# Altium PCB PCB.PcbDoc
Units mm, origin at the board's own origin, x right, y up, seen from the top; angles counter-clockwise.
Board outline 70 x 70 mm, 4 copper layers (Top Layer, Internal Plane 1, Internal Plane 2, Bottom Layer), stack 0.462 mm thick; 54 components, 48 nets, 334 pads, 42 vias.
Unrouted connection lines stored in the file: 5.
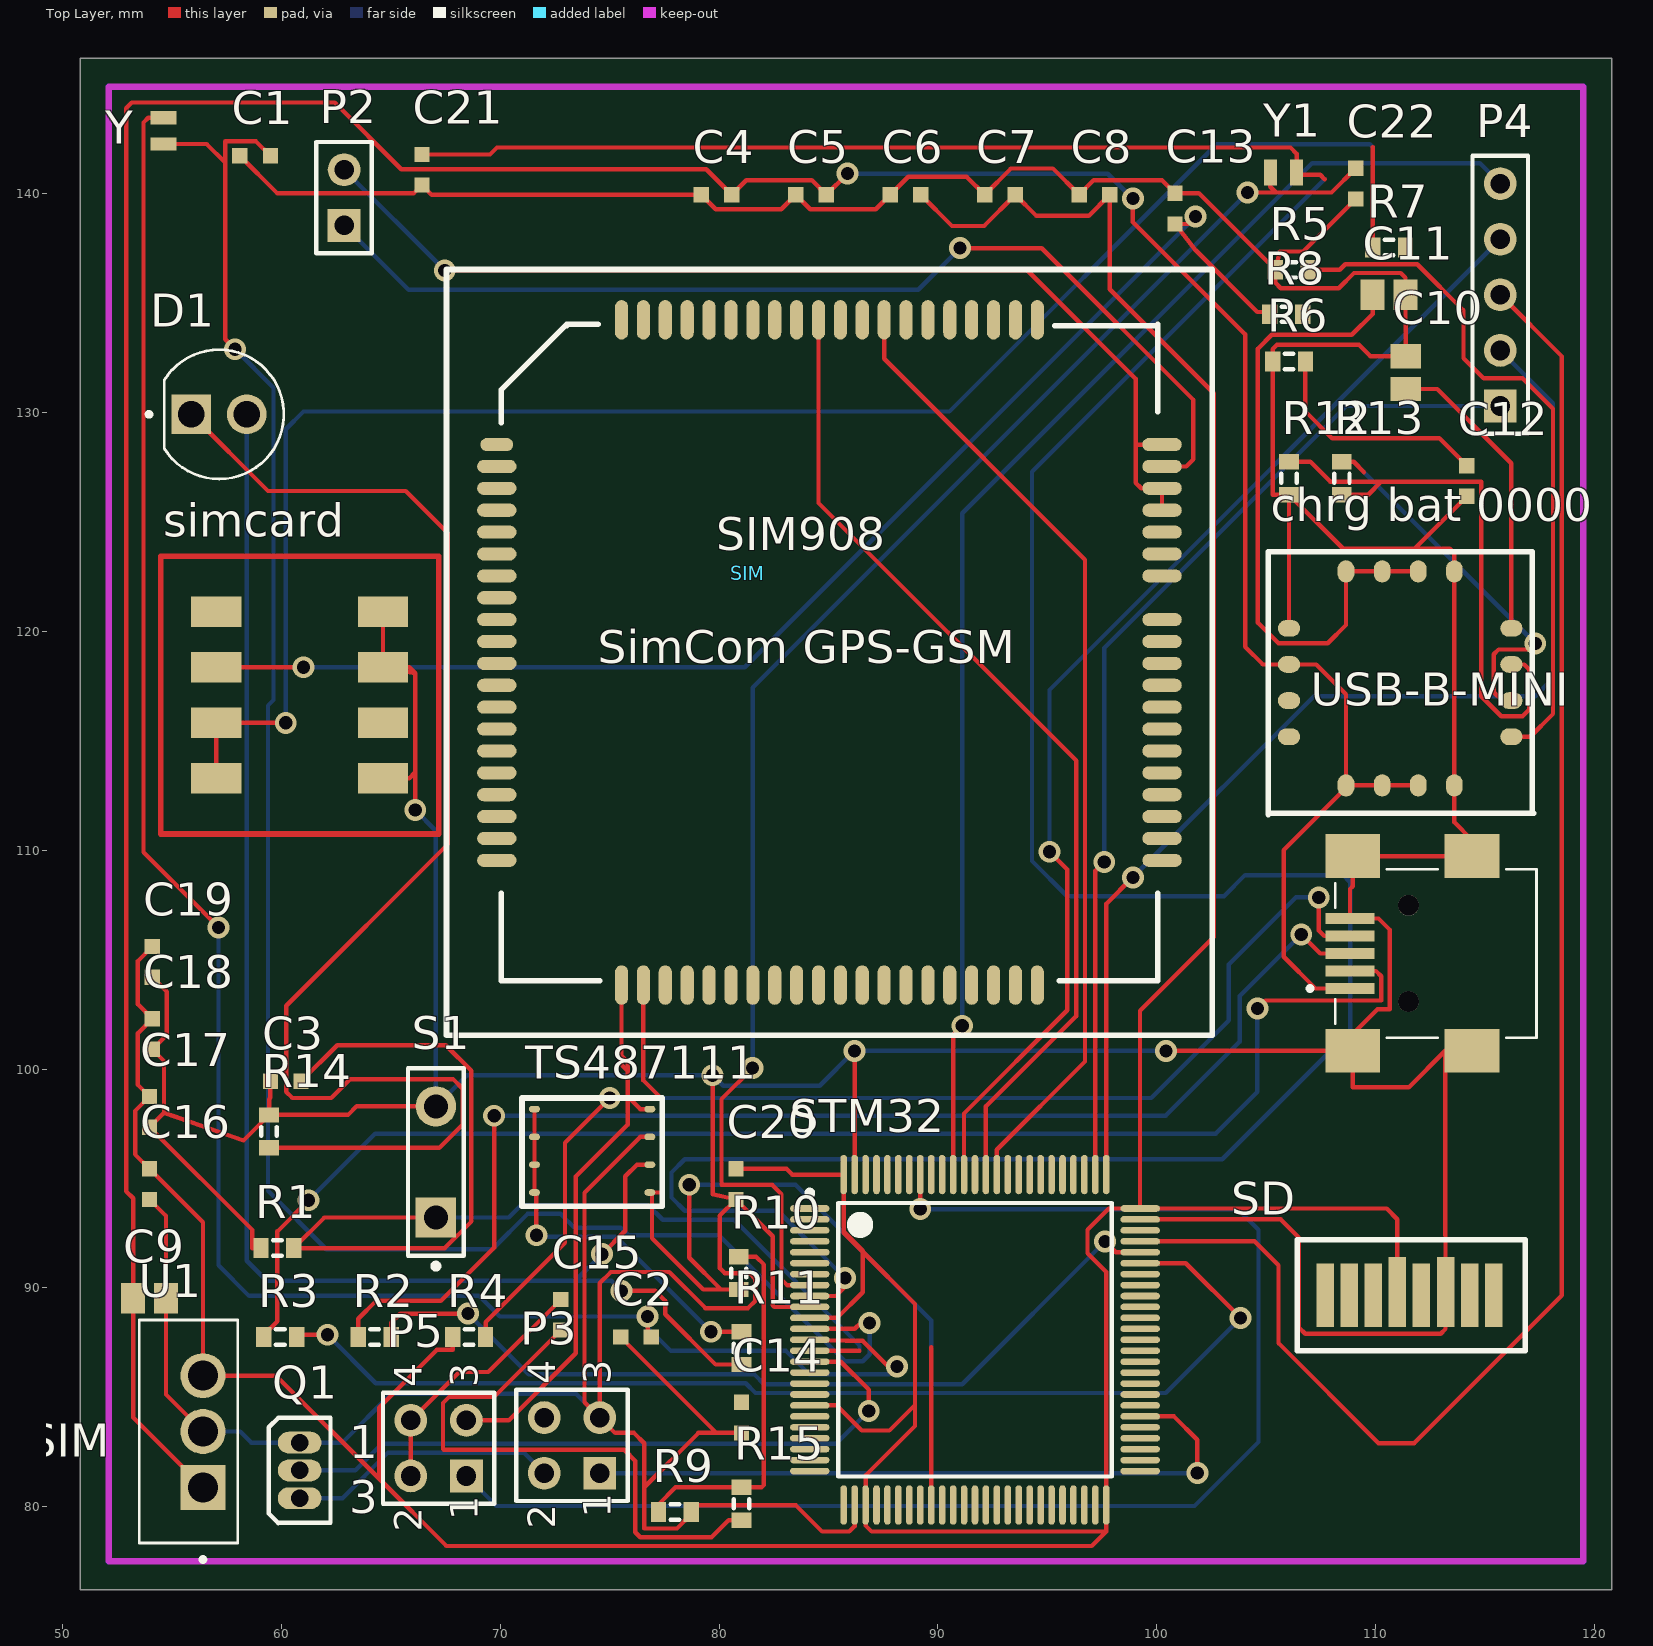
[diagram p0: Top Layer view]
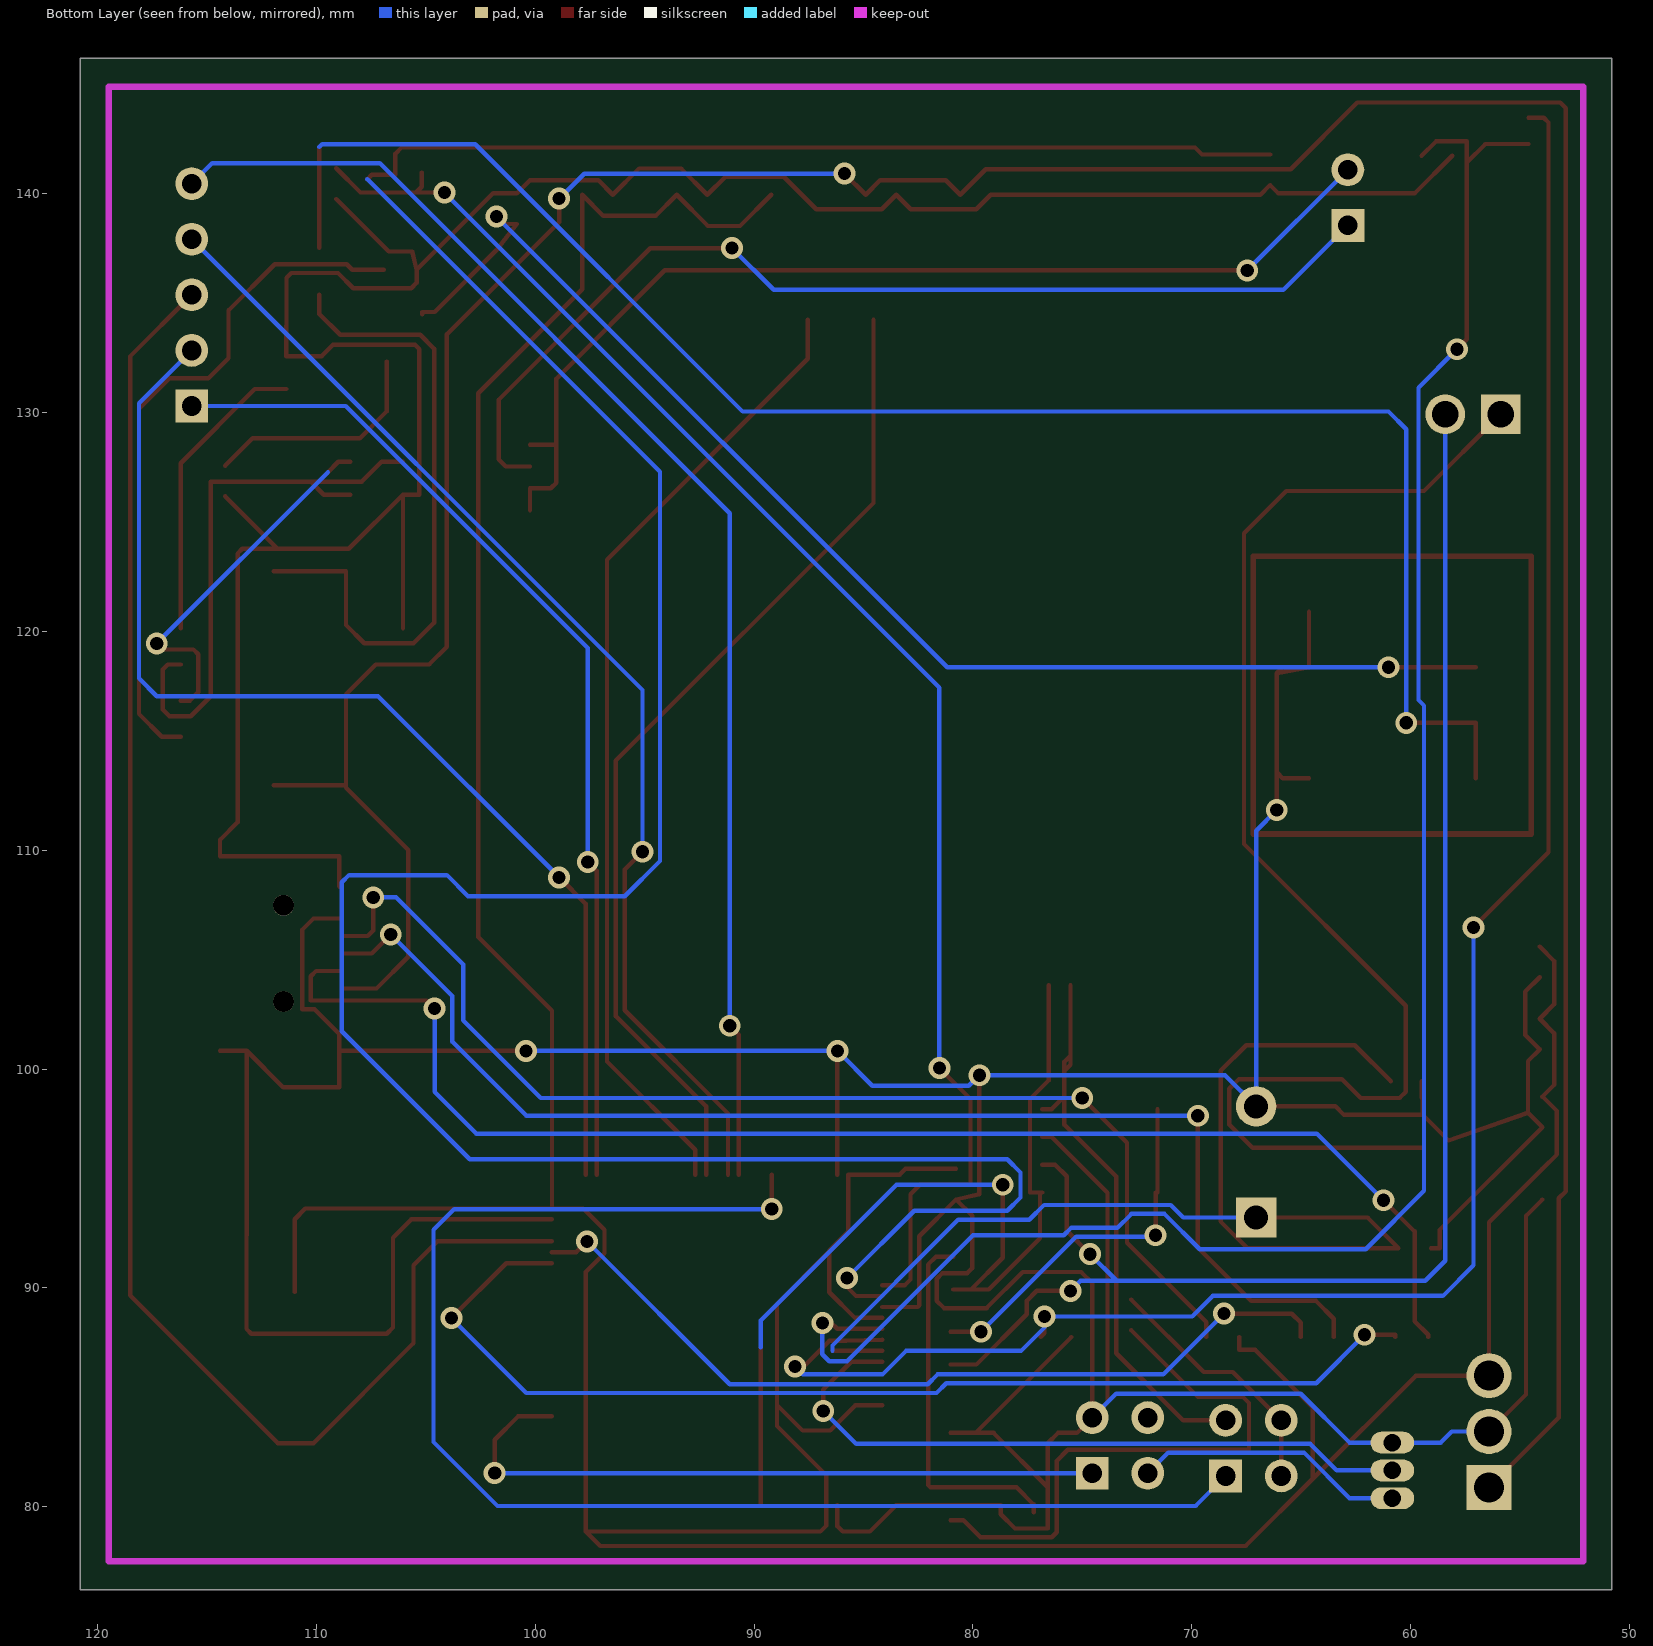
[diagram p1: Bottom Layer view, seen from below]
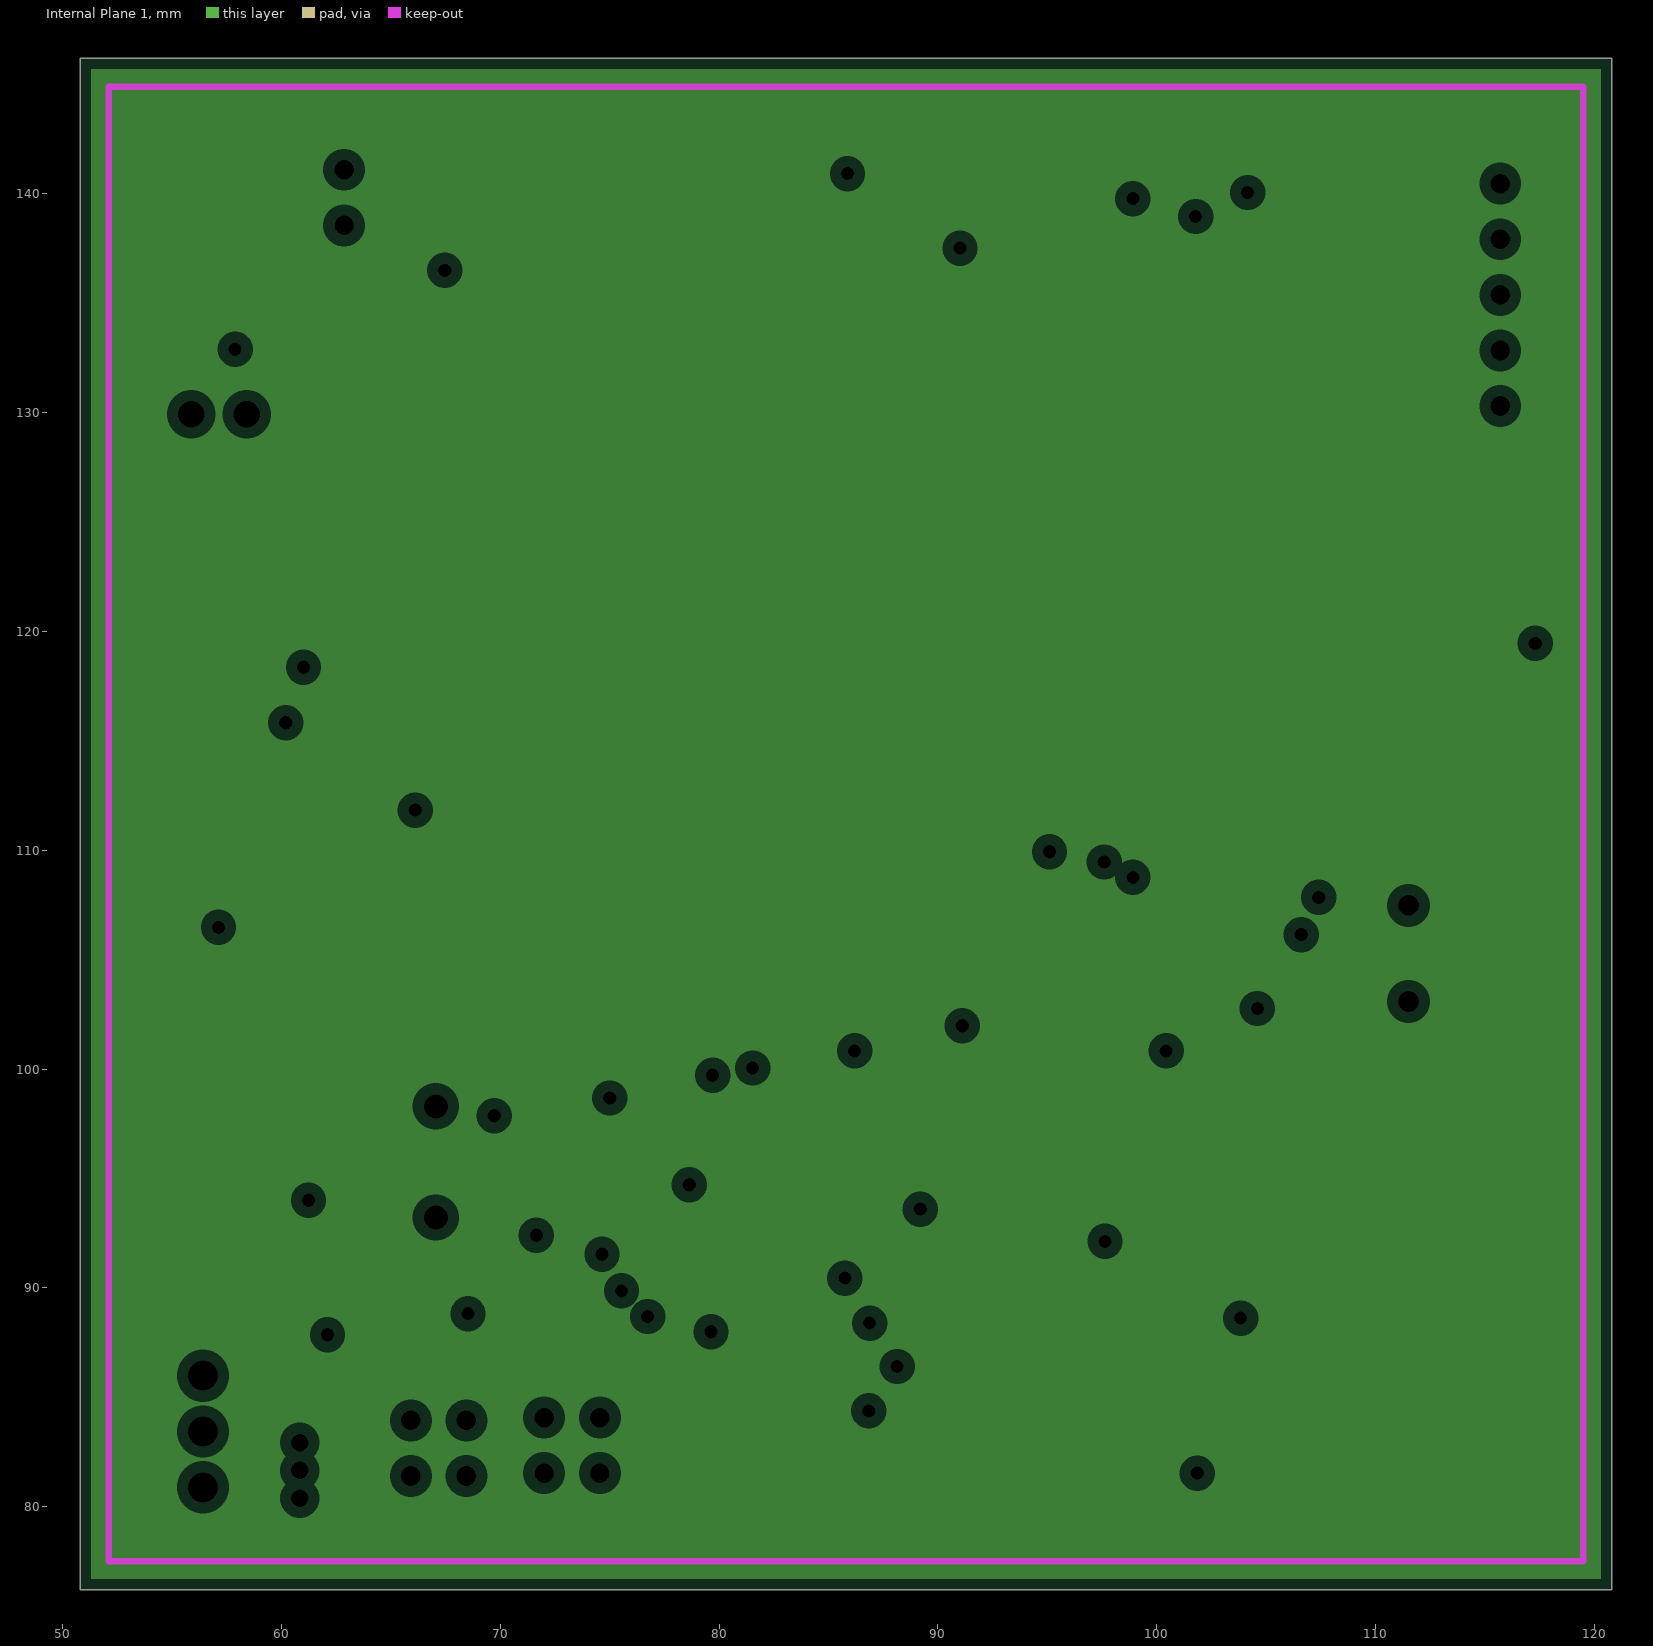
[diagram p2: Internal Plane 1, clearances drawn from the general rule]
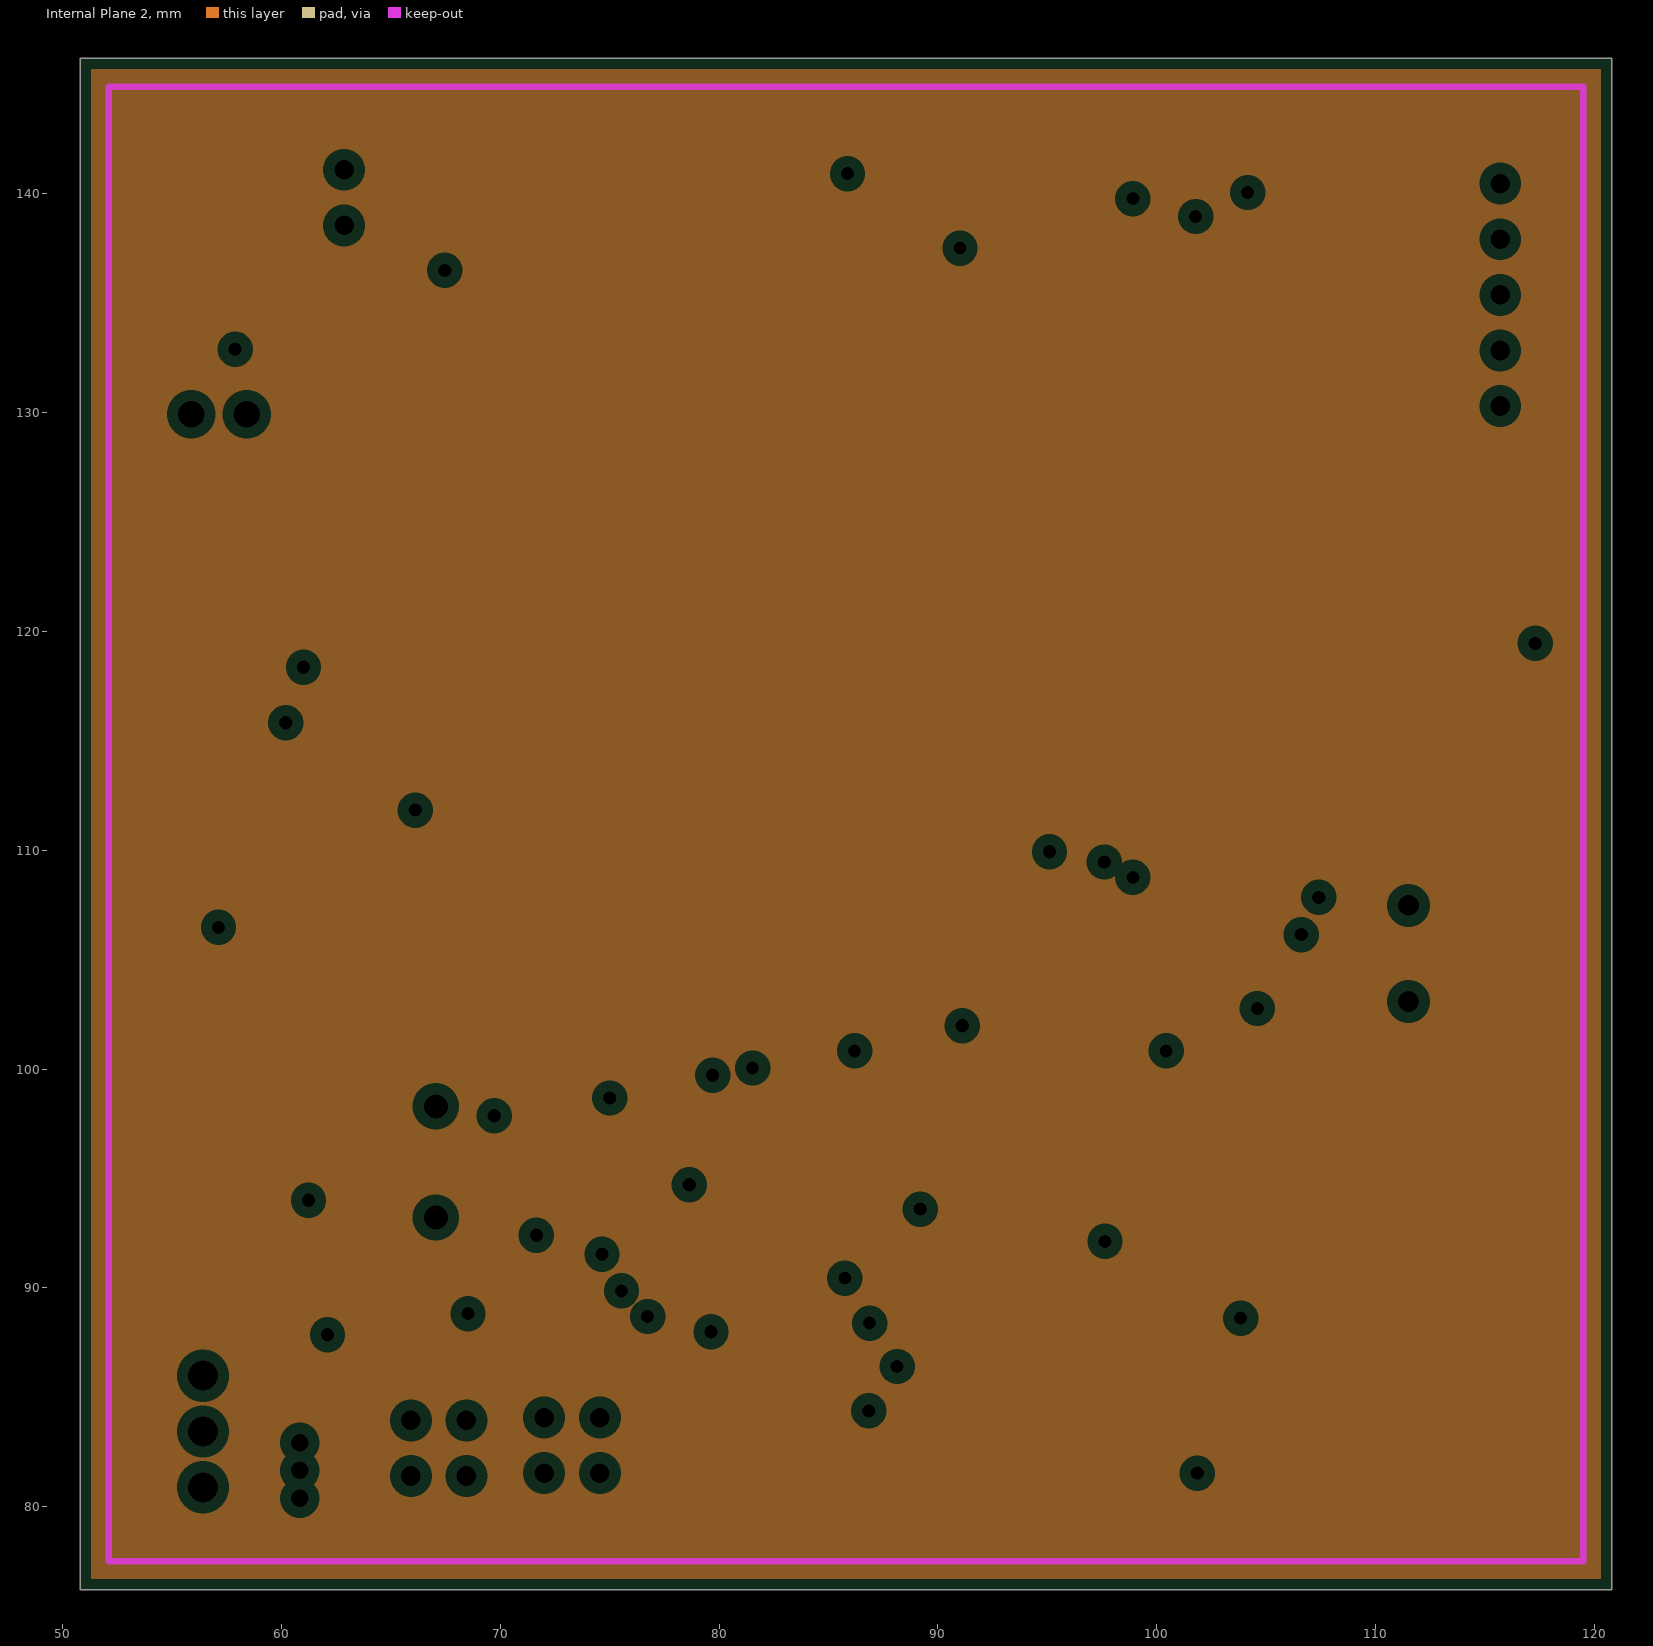
[diagram p3: Internal Plane 2, clearances drawn from the general rule]
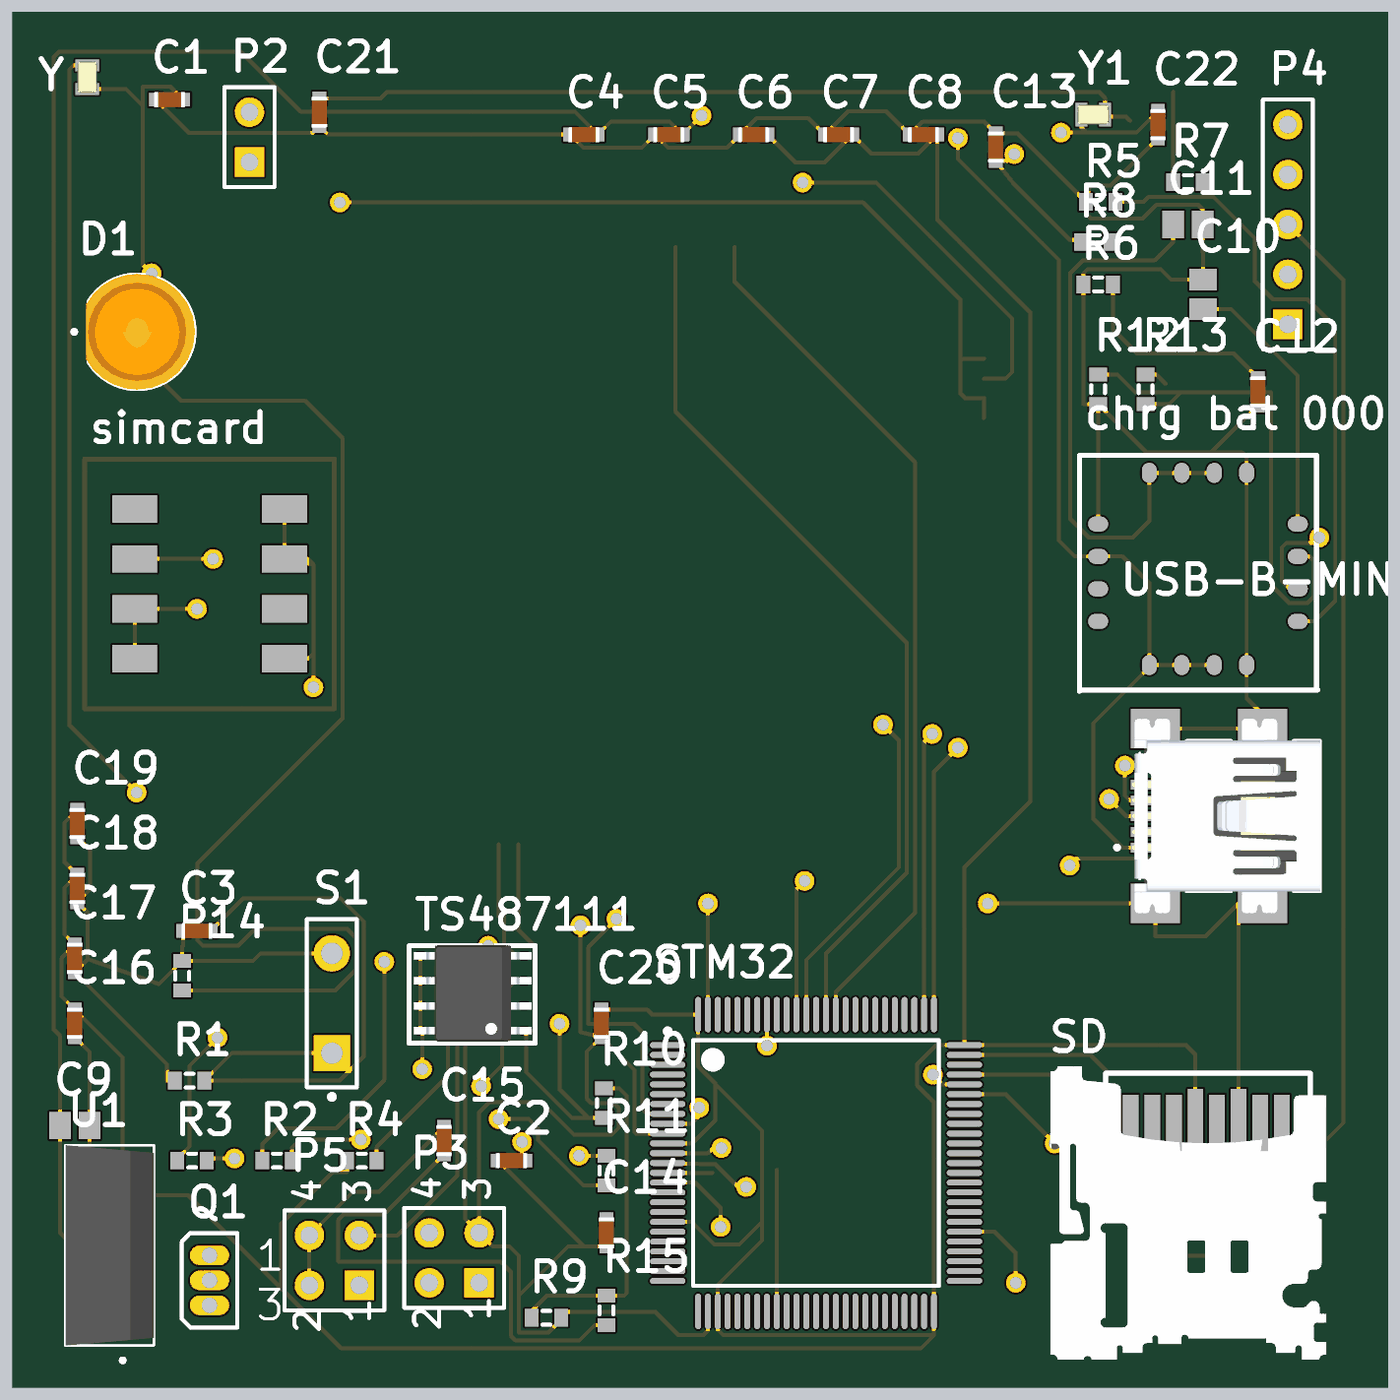
[diagram p4: 3D render of the assembled board from above, using the file's embedded part models]

## Layer stack, top to bottom
Top Solder: solder mask 0.0102, Solder Resist, Dk 3.5
Top Layer: signal copper 0.0356
Internal Plane 1: plane copper 0.0356
Internal Plane 2: plane copper 0.0356
Dielectric 1: dielectric 0.32, FR-4, Dk 4.8
Bottom Layer: signal copper 0.0356
Bottom Solder: solder mask 0.0102, Solder Resist, Dk 3.5

## Board outline
50.8,76.2 120.8,76.2 120.8,146.2 50.8,146.2

## Design rules (kind name [scope] priority, off if disabled: settings)
Clearance [All] p1: gap=0.2
PlaneClearance [All] p1: clearance=0.508
PlaneConnect [All] p1: planeconnectstyle=Relief reliefexpansion=0.508 reliefentries=4 reliefconductorwidth=0.254 reliefairgap=0.254
PolygonConnect [All] p1: connectstyle=Relief reliefconductorwidth=0.254 reliefentries=4 polygonreliefangle="90 Angle" airgapwidth=0.254
RoutingVias [All] p1: holewidth=0.6 width=1 viastyle="Through Hole" minholewidth=0.711 minwidth=1.27 maxholewidth=0.711 maxwidth=1.27
SolderMaskExpansion [All] p1: expansion=0.102
Width [All] p1: maxlimit=0.2 minlimit=0.2 preferedwidth=0.2
28 further rules are at their usual default settings.

## Components (designator, comment, footprint, x,y, rotation, side; value= is the part's Value field where it differs from the comment)
C1 "CGJ3E3C0G2D101J080AA" CAP_CGJ3E3C0G2D101J080AA 58.801,141.732 r0 top
C2 "CGJ3E3C0G2D101J080AA" CAP_CGJ3E3C0G2D101J080AA 76.2,87.757 r0 top
C3 "CGJ3E3C0G2D101J080AA" CAP_CGJ3E3C0G2D101J080AA 60.198,99.441 r0 top
C4 "CGJ3E3C0G2D101J080AA" CAP_CGJ3E3C0G2D101J080AA 79.883,139.954 r0 top
C5 "CGJ3E3C0G2D101J080AA" CAP_CGJ3E3C0G2D101J080AA 84.201,139.954 r0 top
C6 "CGJ3E3C0G2D101J080AA" CAP_CGJ3E3C0G2D101J080AA 88.519,139.954 r0 top
C7 "CGJ3E3C0G2D101J080AA" CAP_CGJ3E3C0G2D101J080AA 92.837,139.954 r0 top
C8 "CGJ3E3C0G2D101J080AA" CAP_CGJ3E3C0G2D101J080AA 97.155,139.954 r0 top
C9 "Cap Pol3" C0805 53.975,89.535 r0 top
C10 "Cap Pol3" C0805 111.379,131.826 r90 top
C11 "Cap Pol3" C0805 110.617,135.382 r0 top
C12 "CGJ3E3C0G2D101J080AA" CAP_CGJ3E3C0G2D101J080AA 114.173,126.873 r90 top
C13 "CGJ3E3C0G2D101J080AA" CAP_CGJ3E3C0G2D101J080AA 100.838,139.319 r90 top
C14 "CGJ3E3C0G2D101J080AA" CAP_CGJ3E3C0G2D101J080AA 81.026,84.074 r90 top
C15 "CGJ3E3C0G2D101J080AA" CAP_CGJ3E3C0G2D101J080AA 72.771,88.773 r90 top
C16 "CGJ3E3C0G2D101J080AA" CAP_CGJ3E3C0G2D101J080AA 53.975,94.742 r90 top
C17 "CGJ3E3C0G2D101J080AA" CAP_CGJ3E3C0G2D101J080AA 53.975,98.044 r90 top
C18 "CGJ3E3C0G2D101J080AA" CAP_CGJ3E3C0G2D101J080AA 54.102,101.6 r90 top
C19 "CGJ3E3C0G2D101J080AA" CAP_CGJ3E3C0G2D101J080AA 54.102,104.902 r90 top
C20 "CGJ3E3C0G2D101J080AA" CAP_CGJ3E3C0G2D101J080AA 80.772,94.742 r90 top
C21 "CGJ3E3C0G2D101J080AA" CAP_CGJ3E3C0G2D101J080AA 66.421,141.097 r90 top
C22 "CGJ3E3C0G2D101J080AA" CAP_CGJ3E3C0G2D101J080AA 109.093,140.462 r90 top
"chrg bat 0000" "chrg bat 0000" "chrg bat 0000" 106.045,115.189 r90 top
D1 "L08R5000Q1" LEDRD254W57D500H1070 57.15,129.921 r0 top
P2 "Header 2" HDR1X2 62.865,138.557 r90 top
P3 "Header 2X2" HDR2X2 74.549,81.534 r90 top
P4 "Header 5" HDR1X5 115.697,130.302 r90 top
P5 "Header 2X2" HDR2X2 68.453,81.407 r90 top
Q1 "MOSFET-P" E3 60.833,81.661 r0 top
R1 "Res3" J1-0603 59.817,91.821 r0 top
R2 "Res3" J1-0603 64.262,87.757 r0 top
R3 "Res3" J1-0603 59.944,87.757 r0 top
R4 "Res3" J1-0603 68.58,87.757 r0 top
R5 "Res3" J1-0603 106.172,136.525 r0 top
R6 "Res3" J1-0603 106.045,132.334 r0 top
R7 "Res3" J1-0603 110.617,137.541 r0 top
R8 "Res3" J1-0603 105.918,134.493 r0 top
R9 "Res3" J1-0603 77.978,79.756 r0 top
R10 "Res3" J1-0603 80.899,90.678 r90 top
R11 "Res3" J1-0603 81.026,87.249 r90 top
R12 "Res3" J1-0603 106.045,127 r90 top
R13 "Res3" J1-0603 108.458,127 r90 top
R14 "Res3" J1-0603 59.436,97.155 r90 top
R15 "Res3" J1-0603 81.026,80.137 r90 top
S1 "SW-PB" SPST-2 67.056,95.758 r90 top
SD "SD" sd2 107.696,89.662 r0 top
SIM "SIM908" "Sim 908" 790.321,1066.927 r0 top
simcard "MOLEX91228A" PCBComponent_1 57.023,120.904 r0 top
STM32 "STM32F407VGT6" STM-LQFP100_N 91.694,87.63 r0 top
TS487111 "TS487111" TS4871B 71.628,95.377 r90 top
U1 "L7805" TO255P1020X450X2000-3 55.753,83.439 r90 top
USB-B-MINI "10033526-N3212LF" AMPHENOL_10033526-N3212LF 111.506,105.283 r90 top
Y "XTAL" XTAL_CM9V-T1A-32.768KHZ-7PF-20PPM-TA-QC 54.61,142.875 r90 top
Y1 "XTAL" XTAL_CM9V-T1A-32.768KHZ-7PF-20PPM-TA-QC 105.791,140.97 r0 top

## Footprints (in the part's own frame and the unit in brackets; to place one, negate y for a bottom-side part, rotate by r counter-clockwise, add the part's x,y. Pads: shape width x height; smd on the part's side, far side on the other; paste and mask are expansions set on the pad)
AMPHENOL_10033526-N3212LF [mm]
  rect 0.5x2.25 smd: 1(-1.6,2.675) 2(-0.8,2.675) 3(0,2.675) 4(0.8,2.675) 5(1.6,2.675)
  rect 2x2.5 smd: SH1(-4.45,2.55) SH2(4.45,2.55) SH3(-4.45,-2.9) SH4(4.45,-2.9)
  round 0.95 hole 0.95 unplated: ""(-2.2,0) ""(2.2,0)
  silkscreen extent -3.85,-5.85 3.85,4.6, body extent -4.95,-5.85 4.95,3.72, height 3.95
C0805 [mm] "Chip Capacitor, Body 2.0x1.3mm, IPC High Density"
  rect 1.1x1.4 smd: 1(-0.75,0) 2(0.75,0)
  body extent -1.1,-0.72 1.1,0.72, height 1.4
CAP_CGJ3E3C0G2D101J080AA [mm]
  rect 0.7x0.7 smd: 1(-0.7,0) 2(0.7,0)
  body extent -0.8,-0.4 0.8,0.4, height 0.9
"chrg bat 0000" [mil] "chrg bat 0000"
  oval 40x30 smd: 1(-87.5,-102.5) 2(-87.5,-167.5) 3(-87.5,-232.5) 4(-87.5,-297.5) 9(297.5,-297.5) 10(297.5,-232.5) 11(297.5,-167.5) 12(297.5,-102.5)
  oval 30x40 smd: 5(0,-400) 6(65,-400) 7(130,-400) 8(195,-400) 13(195,0) 14(130,0) 15(65,0) 16(0,0)
  silkscreen extent -140,-440 332,38
E3 [mm] "TO, Flat Index; 3 In-Line, Axial Leads; Body Dia. 4.6mm; Lead Dia. 0.5 mm (max)"
  oval 2x1 hole 0.8: 1(0,1.27) 2(0,0) 3(0,-1.27)
  silkscreen extent -1.41,-2.41 1.41,2.41
HDR1X2 [mm] "Connector; Header; 2 Position"
  rect 1.5x1.5 hole 0.9: 1(0,0)
  round 1.5 hole 0.9: 2(2.54,0)
  silkscreen extent -1.27,-1.27 3.81,1.27
HDR1X5 [mm] "Connector; Header; 5 Position"
  rect 1.5x1.5 hole 0.9: 1(0,0)
  round 1.5 hole 0.9: 2(2.54,0) 3(5.08,0) 4(7.62,0) 5(10.16,0)
  silkscreen extent -1.27,-1.27 11.43,1.27
HDR2X2 [mm] "Connector; Header; 2x2 Position"
  rect 1.5x1.5 hole 0.9: 1(0,0)
  round 1.5 hole 0.9: 2(0,2.54) 3(2.54,0) 4(2.54,2.54)
  silkscreen extent -1.27,-1.27 3.81,3.81
J1-0603 [mm] "Chip Resistor, Body 1.6x0.8mm, IPC High Density"
  rect 0.7x0.9 smd: 1(-0.75,0) 2(0.75,0)
  silkscreen extent -0.2,-0.35 0.2,0.35, body extent -0.85,-0.48 0.85,0.48, height 0.9
LEDRD254W57D500H1070 [mm]
  round 1.815 hole 1.21: A(1.27,0)
  rect 1.815x1.815 / inner round 1.815 / far side rect 1.815x1.815 hole 1.21: C(-1.27,0)
  silkscreen extent -3.3,-2.96 2.96,2.96, body extent -2.6,-2.95 2.95,2.95, height 9.1
PCBComponent_1 [mm]
  rect 2.3x1.4 smd: 1(0,0) 2(0,-2.54) 3(0,-5.08) 4(0,-7.62) 5(7.62,0) 6(7.62,-2.54) 7(7.62,-5.08) 8(7.62,-7.62)
  Top Layer lines w0.254: -2.54,-10.16 -2.54,2.54 10.16,2.54 10.16,-10.16 -2.54,-10.16
sd2 [mm] "sd2"
  rect 0.8x2.9 smd: 1(0,0) 2(1.1,0) 3(2.2,0) 5(4.4,0) 7(6.6,0) 8(7.7,0)
  rect 0.8x3.2 smd: 4(3.3,0.15) 6(5.5,0.15)
  silkscreen extent -1.27,-2.54 9.14,2.54, body extent -4.53,-12.05 10.41,2.9
"Sim 908" [mm]
  oval 1.5x0.6 smd: 1(-720.478,-938.388)
  oval 1.8x0.6 smd: 2(-720.478,-939.388) 3(-720.478,-940.388) 4(-720.478,-941.388) 5(-720.478,-942.388) 6(-720.478,-943.388) 7(-720.478,-944.388) 8(-720.478,-945.388) 9(-720.478,-946.388) 10(-720.478,-947.388) 11(-720.478,-948.388) 12(-720.478,-949.388) 13(-720.478,-950.388) 14(-720.478,-951.388) 15(-720.478,-952.388) 16(-720.478,-953.388) 17(-720.478,-954.388) 18(-720.478,-955.388) 19(-720.478,-956.388) 20(-720.478,-957.388) 41(-690.078,-957.388) 42(-690.078,-956.388) 43(-690.078,-955.388) 44(-690.078,-954.388) 45(-690.078,-953.388) 46(-690.078,-952.388) 47(-690.078,-951.388) 48(-690.078,-950.388) 49(-690.078,-949.388) 50(-690.078,-948.388) 51(-690.078,-947.388) 52(-690.078,-946.388) 54(-690.078,-944.388) 55(-690.078,-943.388) 56(-690.078,-942.388) 57(-690.078,-941.388) 58(-690.078,-940.388) 59(-690.078,-939.388) 60(-690.078,-938.388)
  oval 0.6x1.8 smd: 21(-714.778,-963.088) 22(-713.778,-963.088) 23(-712.778,-963.088) 24(-711.778,-963.088) 25(-710.778,-963.088) 26(-709.778,-963.088) 27(-708.778,-963.088) 28(-707.778,-963.088) 29(-706.778,-963.088) 30(-705.778,-963.088) 31(-704.778,-963.088) 32(-703.778,-963.088) 33(-702.778,-963.088) 34(-701.778,-963.088) 35(-700.778,-963.088) 36(-699.778,-963.088) 37(-698.778,-963.088) 38(-697.778,-963.088) 39(-696.778,-963.088) 40(-695.778,-963.088) 61(-695.778,-932.688) 62(-696.778,-932.688) 63(-697.778,-932.688) 64(-698.778,-932.688) 65(-699.778,-932.688) 66(-700.778,-932.688) 67(-701.778,-932.688) 68(-702.778,-932.688) 69(-703.778,-932.688) 70(-704.778,-932.688) 71(-705.778,-932.688) 72(-706.778,-932.688) 73(-707.778,-932.688) 74(-708.778,-932.688) 75(-709.778,-932.688) 76(-710.778,-932.688) 77(-711.778,-932.688) 78(-712.778,-932.688) 79(-713.778,-932.688) 80(-714.778,-932.688)
  round 0 smd: 53(-727.964,-925.449)
  silkscreen extent -722.78,-965.39 -687.78,-930.39, body extent -720.04,-963.04 -690.04,-933.04, height 0.89
SPST-2 [mm] "Switch; 2 Leads"
  rect 1.85x1.85 hole 1.1: 1(-2.54,0)
  round 1.85 hole 1.1: 2(2.54,0)
  silkscreen extent -4.89,-1.27 4.28,1.27
STM-LQFP100_N [mm] "Thin QFP, 100-Leads, Body 14x14mm, Pitch 0.5mm, IPC Medium Density"
  oval 1.8x0.3 smd: 1(-7.55,6) 2(-7.55,5.5) 3(-7.55,5) 4(-7.55,4.5) 5(-7.55,4) 6(-7.55,3.5) 7(-7.55,3) 8(-7.55,2.5) 9(-7.55,2) 10(-7.55,1.5) 11(-7.55,1) 12(-7.55,0.5) 13(-7.55,0) 14(-7.55,-0.5) 15(-7.55,-1) 16(-7.55,-1.5) 17(-7.55,-2) 18(-7.55,-2.5) 19(-7.55,-3) 20(-7.55,-3.5) 21(-7.55,-4) 22(-7.55,-4.5) 23(-7.55,-5) 24(-7.55,-5.5) 25(-7.55,-6) 51(7.55,-6) 52(7.55,-5.5) 53(7.55,-5) 54(7.55,-4.5) 55(7.55,-4) 56(7.55,-3.5) 57(7.55,-3) 58(7.55,-2.5) 59(7.55,-2) 60(7.55,-1.5) 61(7.55,-1) 62(7.55,-0.5) 63(7.55,0) 64(7.55,0.5) 65(7.55,1) 66(7.55,1.5) 67(7.55,2) 68(7.55,2.5) 69(7.55,3) 70(7.55,3.5) 71(7.55,4) 72(7.55,4.5) 73(7.55,5) 74(7.55,5.5) 75(7.55,6)
  oval 0.3x1.8 smd: 26(-6,-7.55) 27(-5.5,-7.55) 28(-5,-7.55) 29(-4.5,-7.55) 30(-4,-7.55) 31(-3.5,-7.55) 32(-3,-7.55) 33(-2.5,-7.55) 34(-2,-7.55) 35(-1.5,-7.55) 36(-1,-7.55) 37(-0.5,-7.55) 38(0,-7.55) 39(0.5,-7.55) 40(1,-7.55) 41(1.5,-7.55) 42(2,-7.55) 43(2.5,-7.55) 44(3,-7.55) 45(3.5,-7.55) 46(4,-7.55) 47(4.5,-7.55) 48(5,-7.55) 49(5.5,-7.55) 50(6,-7.55) 76(6,7.55) 77(5.5,7.55) 78(5,7.55) 79(4.5,7.55) 80(4,7.55) 81(3.5,7.55) 82(3,7.55) 83(2.5,7.55) 84(2,7.55) 85(1.5,7.55) 86(1,7.55) 87(0.5,7.55) 88(0,7.55) 89(-0.5,7.55) 90(-1,7.55) 91(-1.5,7.55) 92(-2,7.55) 93(-2.5,7.55) 94(-3,7.55) 95(-3.5,7.55) 96(-4,7.55) 97(-4.5,7.55) 98(-5,7.55) 99(-5.5,7.55) 100(-6,7.55)
  silkscreen extent -7.67,-6.25 6.25,6.82, body extent -7,-7 7,7, height 1.6
TO255P1020X450X2000-3 [mm]
  rect 2.055x2.055 / inner round 2.055 / far side rect 2.055x2.055 hole 1.37: 1(-2.55,-0.662)
  round 2.055 hole 1.37: 2(0,-0.662) 3(2.55,-0.662)
  silkscreen extent -5.95,-2.25 5.1,2.25, body extent -5.1,-2.25 5.1,2.25, height 20
TS4871B [mm] "TS4871B"
  oval 0.3x0.5 smd: 1(-1.016,0.063) 1(0.254,0.064) 1(1.524,0.064) 1(2.794,0.064) 5(-1.016,-5.207) 6(0.254,-5.207) 7(1.524,-5.207) 8(2.794,-5.207)
  silkscreen extent -1.65,-5.78 3.3,0.64, body extent -1.56,-5.6 3.34,0.4, height 1.75
XTAL_CM9V-T1A-32.768KHZ-7PF-20PPM-TA-QC [mm]
  rect 0.6x1.2 smd: 1(-0.6,0) 2(0.6,0)
  body extent -0.8,-0.5 0.8,0.5, height 0.5

## Part data
C1 C2 C3 C4 C5 C6 C7 C8 C12 C13 C14 C15 C16 C17 C18 C19 C20 C21 C22: "High Reliability - Autograde Plus+ / 7 (180mm)"
C9 C10 C11: "Polarized Capacitor (Surface Mount)"
"chrg bat 0000" SD simcard TS487111: library part Component_1
D1: "LED, 5MM, ORANGE; LED / Lamp Size: 5mm / T-1 3/4; LED Colour: Orange; Typ Luminous Intensity: 4.3mcd; Viewing Angle: ..."
P2: "Header, 2-Pin"
P3 P5: "Header, 2-Pin, Dual row"
P4: "Header, 5-Pin"
Q1: "P-Channel MOSFET"
R1 R2 R3 R4 R5 R6 R7 R8 R9 R10 R11 R12 R13 R14 R15: "Resistor"
S1: "Switch"
STM32: "ARM Cortex-M4 32-bit MCU+FPU, 210 DMIPS, 1024 kB Flash, 192 kB Internal RAM, 82 I/Os, 100-pin LQFP, -40 to 85 degC, Tray"
U1: "Standard Regulator Pos 5V 1.5A 3-Pin(3+Tab) TO-220FP Tube"
USB-B-MINI: "Conn Mini USB Type B RCP 5 POS 0.8mm Solder RA SMD 5 Terminal 1 Port T/R"
Y Y1: library part CM9V-T1A-32.768KHZ-7PF-20PPM-TA-QC, "Tuning Fork Crystal 32.768kHz in 1.0x 1.6mm package"

## Via types
v1: diameter 1, hole 0.6, Top Layer to Bottom Layer, 42 vias

## Nets (pads, with @x,y where several pads share a name; then routed paths per layer and width w, separated by ;. In a path a pad name is that pad's centre, name@x,y a point inside that pad or via, vN(x,y) a via of type N, cw(c..) or ccw(c..) an arc to the next point about the centre after c; other vN are vias at no path point)
3.3V: C6.2 C7.2 C8.2 C16.2 C17.2 C18.2 C19.2 C20.2 R4.1 SD.4 STM32.11 STM32.19 STM32.28 STM32.50 STM32.75 STM32.100 U1.3 | length 214.1
  Top Layer w0.2: C19.2 53.442,104.942 53.442,102.96 C18.2 53.442,101.64 53.442,99.277 C17.2 53.315,98.084 53.315,96.102 C16.2 56.415,93.002 U1.3 59.756,85.989 64.465,81.28 ; R4.1 67.83,87.173 67.107,87.173 64.465,84.531 64.465,81.28 ; C20.2 83.083,95.442 83.345,95.18 STM32.100 85.694,92.563 ; STM32.19 85.375,84.63 86.519,83.486 87.782,83.486 88.951,84.654 ; STM32.11 85.389,88.63 86.563,89.804 86.563,91.654 ; C6.2 90.645,138.528 92.111,138.528 C7.2 94.502,138.989 96.89,138.989 C8.2 97.855,135.636 102.605,130.886 102.605,106.034 99.238,102.667 STM32.75@99.238,93.63 ; SD.4 110.996,93.142 110.508,93.63 STM32.75 STM32.75@99.238,93.63 ; 64.465,81.28 67.539,78.206 97.033,78.206 97.694,78.867 ; 85.694,92.563 85.694,92.523 86.563,91.654 ; 85.694,92.563 86.563,91.694 86.563,91.654 ; 86.563,91.654 88.951,89.266 88.951,84.654 ; 88.951,84.654 88.951,83.689 86.694,81.432 STM32.28 86.694,79.143 86.97,78.867 97.694,78.867 ; 97.694,78.867 STM32.50 97.694,90.73 96.838,91.586 96.838,92.659 97.808,93.63 STM32.75@99.238,93.63
GND: "chrg bat 0000.4" "chrg bat 0000.9" "chrg bat 0000.13" C1.1 C2.1 C3.1 C4.1 C5.1 C6.1 C7.1 C8.1 C9.2 C10.2 C11.2 C12.1 C13.2 C14.1 C16.1 C17.1 C18.1 C19.1 C20.1 C21.1 C22.1 P3.3 Q1.1 R1.1 R5.1 R6.1 R9.2 R12.1 R14.2 S1.2 SD.6 simcard.5 simcard.6 simcard.8 STM32.10 STM32.27 STM32.74 STM32.99 TS487111.7 U1.2 USB-B-MINI.5 USB-B-MINI.SH1 USB-B-MINI.SH2 USB-B-MINI.SH3 USB-B-MINI.SH4 | length 393.6
  Top Layer w0.2: C16.1 54.725,93.292 C9.2 54.725,85.129 U1.2 ; C19.1 54.762,103.542 54.762,101.56 C18.1 54.635,100.367 54.635,98.004 ; C1.1 59.803,140.03 66.054,140.03 C21.1 66.864,139.954 C4.1 79.843,139.294 82.841,139.294 C5.1 84.161,139.294 87.159,139.294 C6.1 88.646,140.781 91.31,140.781 C7.1 93.337,141.154 95.255,141.154 C8.1 97.115,140.614 100.243,140.614 C13.2 101.928,140.019 R5.1 ; R1.1 58.674,91.821 58.674,92.645 C17.1 54.635,98.004 ; C3.1 59.498,98.69 59.436,98.628 R14.2 ; simcard.8 65.837,113.284 66.116,113.563 ; simcard.5 simcard.6 ; v1(66.116,111.836) 66.116,113.563 ; S1.2 63.436,98.298 63.043,97.905 R14.2 ; C2.1 79.883,83.374 ; TS487111.7 76.403,96.901 73.851,94.348 73.851,84.772 P3.3 ; v1(79.705,99.72) 79.705,94.285 C20.1 ; C14.1 79.883,83.374 ; STM32.10 82.522,89.13 82.449,89.203 82.449,92.365 C20.1 ; STM32.27 86.194,79.107 85.954,78.867 84.709,78.867 83.515,80.061 78.728,80.061 R9.2 78.728,79.654 78.08,79.006 76.578,79.006 76.578,80.896 ; STM32.99 v1(86.194,100.833) ; STM32.74 105.664,93.13 106.502,92.292 106.502,88.189 106.782,87.909 112.979,87.909 113.196,88.126 SD.6 ; v1(100.427,100.833) USB-B-MINI.SH1 ; 106.045,120.142 R12.1 ; C22.1 106.694,137.363 105.625,137.363 R5.1 ; C12.1 111.774,123.774 ; USB-B-MINI.SH3 USB-B-MINI.SH3@113.182,100.833 ; 54.635,98.004 58.266,96.735 R14.2 ; simcard.6 66.116,118.085 ; simcard.6 65.837,118.364 66.116,118.085 ; 66.116,113.563 66.116,118.085 ; P3.3 74.549,90.221 75.057,90.729 77.724,90.729 79.375,89.078 81.319,89.078 81.649,89.408 81.649,90.424 81.395,90.678 80.264,90.678 80.035,90.907 80.035,93.305 C20.1 ; P3.3 75.249,83.374 76.11,83.374 76.578,82.906 76.578,80.896 ; 76.578,80.896 79.056,83.374 79.883,83.374 ; R5.1 105.422,135.929 105.664,135.687 108.322,135.687 109.017,136.382 111.15,136.382 111.367,136.165 C11.2 111.367,133.972 111.379,133.96 C10.2 109.765,132.576 109.245,133.096 105.498,133.096 105.295,132.893 R6.1 105.295,126.25 R12.1 ; R12.1 108.521,123.774 111.774,123.774 ; USB-B-MINI.SH1 108.956,99.172 111.511,99.162 USB-B-MINI.SH3@113.182,100.833 ; USB-B-MINI.SH1 108.956,101.6 110.089,102.733 110.656,102.733 110.656,106.361 110.134,106.883 USB-B-MINI.5 108.831,108.229 108.956,108.354 USB-B-MINI.SH2 USB-B-MINI.SH4 114.406,110.473 113.602,111.277 113.602,112.966 113.602,122.745 113.602,123.558 113.386,123.774 111.774,123.774 ; 113.182,94.945 USB-B-MINI.SH3@113.182,100.833 ; 113.182,94.945 SD.6 ; 113.182,94.945 113.196,94.932 SD.6
  Bottom Layer w0.2: U1.2 58.115,83.439 58.623,82.931 Q1.1 62.789,82.931 65.024,85.166 73.457,85.166 P3.3 ; v1(66.116,111.836) 67.056,110.896 S1.2 68.478,99.72 v1(79.705,99.72) 80.188,99.238 84.599,99.238 v1(86.194,100.833) v1(100.427,100.833)
NetC1_2: C1.2 STM32.12 Y.1 | length 91
  Top Layer w0.2: Y.1 56.582,142.275 57.429,141.427 ; v1(57.887,132.893) 57.429,133.35 57.429,141.427 ; C1.2 58.841,142.392 57.429,142.392 57.429,141.427 ; STM32.12 86.2,88.13 86.462,88.392 v1(86.881,88.392)
  Bottom Layer w0.2: v1(57.887,132.893) 59.639,131.14 59.639,116.865 59.385,116.611 59.385,94.437 62.052,91.77 69.634,91.77 71.247,93.383 72.758,93.383 73.4,92.742 75.514,92.742 75.851,92.405 79.997,92.405 85.753,86.649 86.563,86.649 86.881,86.967 v1(86.881,88.392)
NetC2_2: C2.2 STM32.13 Y.2 | length 93.7
  Top Layer w0.2: Y.2 53.915,143.475 53.696,143.256 53.696,109.906 v1(57.125,106.477) ; v1(76.733,88.697) 76.733,87.924 C2.2 ; STM32.13 85.801,87.579 86.563,87.579 87.732,86.411 v1(88.138,86.411)
  Bottom Layer w0.2: v1(57.125,106.477) 57.125,91.034 58.522,89.637 69.037,89.637 69.977,88.697 v1(76.733,88.697) 76.733,88.189 77.8,87.122 83.058,87.122 84.131,86.049 87.776,86.049 v1(88.138,86.411)
NetC3_2: C3.2 R1.2 S1.1 STM32.14 | length 56.3
  Top Layer w0.2: C3.2 62.549,101.092 67.512,101.092 68.681,99.923 68.681,93.04 67.462,91.821 R1.2 61.964,93.218 S1.1 ; STM32.14 86.419,87.13
  Bottom Layer w0.2: S1.1 70.384,93.218 70.955,93.789 76.746,93.789 77.426,93.11 80.677,93.11 86.419,87.368 86.419,87.13
NetC4_2: "chrg bat 0000.1" "chrg bat 0000.2" "chrg bat 0000.3" "chrg bat 0000.14" C4.2 C5.2 C9.1 U1.1 USB-B-MINI.1 | length 162
  Top Layer w0.2: U1.1 53.225,84.079 C9.1 53.225,94.095 52.908,94.412 52.908,143.916 53.162,144.17 62.433,144.17 65.481,141.122 79.415,141.122 C4.2 81.243,140.614 84.241,140.614 C5.2 v1(85.866,140.919) ; v1(98.908,139.776) 98.908,138.709 104.038,133.579 104.038,119.304 104.851,118.491 106.045,118.491 107.29,118.491 108.648,117.132 108.648,112.966 ; USB-B-MINI.1 107.254,103.683 105.804,105.133 105.804,110.008 108.648,112.852 108.648,112.966 ; 111.95,112.966 110.299,112.966 108.648,112.966
  Bottom Layer w0.2: v1(85.866,140.919) 97.765,140.919 v1(98.908,139.776)
NetC10_1: "chrg bat 0000.8" C10.1 | length 13.8
  Top Layer w0.2: C10.1 112.815,131.076 116.205,127.686 116.205,120.142
NetC11_1: "chrg bat 0000.10" "chrg bat 0000.11" "chrg bat 0000.12" C11.1 | length 29.8
  Top Layer w0.2: C11.1 109.867,134.505 108.915,133.553 105.258,133.553 104.623,132.918 104.623,120.396 105.562,119.456 107.81,119.456 108.648,120.294 108.648,122.745 110.299,122.745 111.95,122.745
NetC12_2: C12.2 R6.2 | length 10.7
  Top Layer w0.2: R6.2 106.795,130.048 108.014,128.829 112.917,128.829 C12.2
NetC13_1: C13.1 R8.1 simcard.2 | length 60.6
  Top Layer w0.2: simcard.2 v1(61.011,118.364) ; v1(101.778,138.963) 101.433,138.619 C13.1 101.778,137.414 104.597,134.595 105.168,134.595 R8.1
  Bottom Layer w0.2: v1(61.011,118.364) 81.178,118.364 v1(101.778,138.963)
NetC14_2: C14.2
NetC15_1: C15.1 R15.1 | length 26.4
  Top Layer w0.2: C15.1 69.712,85.014 67.659,85.014 67.386,84.741 67.386,82.626 67.412,82.601 75.667,82.601 76.175,82.093 76.175,78.835 76.403,78.606 79.654,78.606 80.435,79.387 R15.1
NetC15_2: C15.2 P5.2 P5.4 | length 11.7
  Top Layer w0.2: P5.2 P5.4 68.123,86.157 69.455,86.157 C15.2
NetC21_2: C21.2 STM32.9 Y1.2 | length 148.3
  Top Layer w0.2: C21.2 69.534,141.797 69.85,142.113 106.112,142.113 106.391,141.834 Y1.2 106.391,140.868 107.467,140.868 107.671,140.665 ; STM32.9 85.344,89.63 85.75,90.036 v1(85.75,90.449)
  Bottom Layer w0.2: v1(85.75,90.449) 82.677,93.523 78.435,93.523 77.826,94.132 77.826,95.275 78.435,95.885 102.997,95.885 108.839,101.727 108.839,108.534 108.509,108.864 104.038,108.864 103.073,107.899 95.91,107.899 94.298,109.512 94.298,127.292 107.671,140.665
NetC22_2: C22.2 STM32.8 Y1.1 | length 69.9
  Top Layer w0.2: v1(81.534,100.051) 80.112,98.628 80.112,94.717 82.423,94.717 82.855,94.285 82.855,90.384 83.109,90.13 STM32.8 ; v1(104.155,140.056) 105.461,140.056 ; Y1.1 105.191,140.325 105.461,140.056 ; C22.2 107.987,140.056 105.461,140.056
  Bottom Layer w0.2: v1(81.534,100.051) 81.534,117.435 v1(104.155,140.056)
"Netchrg bat 0000_5": "chrg bat 0000.5" R5.2 | length 31.6
  Top Layer w0.2: R5.2 108.36,136.525 108.617,136.782 111.909,136.782 114.021,134.671 114.021,132.486 114.935,131.572 116.713,131.572 118.11,130.175 118.11,116.23 117.069,115.189 116.205,115.189
"Netchrg bat 0000_6": "chrg bat 0000.6" R13.2 | length 17.1
  Top Layer w0.2: R13.2 109.003,127.75 109.474,127.279 ; 116.205,116.84 115.778,116.84 115.397,117.221 115.397,118.953 115.621,119.177 117.018,119.177 v1(117.297,119.456)
  Bottom Layer w0.2: 109.474,127.279 v1(117.297,119.456)
"Netchrg bat 0000_7": "chrg bat 0000.7" R12.2 R13.1 | length 26.4
  Top Layer w0.2: R12.2 107.024,127.75 107.926,126.848 110.261,126.848 ; R13.1 109.664,126.25 110.261,126.848 ; 116.205,118.491 116.789,118.491 117.018,118.262 117.018,116.434 116.713,116.129 115.748,116.129 114.833,117.043 114.833,126.848 110.261,126.848
NetD1_C: D1.C R14.1 | length 62.2
  Top Layer w0.2: D1.C 59.385,126.416 65.684,126.416 67.615,124.485 67.615,110.287 60.223,102.895 60.223,98.958 60.503,98.679 62.281,98.679 63.144,99.543 67.843,99.543 68.281,99.105 68.281,97.466 67.22,96.405 R14.1
NetP2_1: P2.1 SIM.59 | length 48
  Top Layer w0.2: v1(91.008,137.516) 94.742,137.516 101.676,130.581 101.676,127.869 101.346,127.539 SIM.59
  Bottom Layer w0.2: P2.1 65.811,135.611 89.103,135.611 v1(91.008,137.516)
NetP2_2: P2.2 SIM.57 SIM.58 SIM.60 | length 48.4
  Top Layer w0.2: v1(67.462,136.5) 94.082,136.5 99.035,131.547 99.035,128.539 ; SIM.57 SIM.58 99.292,126.539 99.035,126.797 99.035,128.539 ; SIM.60 99.035,128.539
  Bottom Layer w0.2: P2.2 v1(67.462,136.5)
NetP3_1: P3.1 STM32.56 | length 31.9
  Top Layer w0.2: STM32.56 100.787,84.13 101.854,83.063 v1(101.854,81.534)
  Bottom Layer w0.2: P3.1 v1(101.854,81.534)
NetP3_2: P3.2 Q1.3 | length 12.4
  Bottom Layer w0.2: Q1.3 62.789,80.391 64.872,82.474 71.069,82.474 P3.2
NetP4_1: P4.1 STM32.77 | length 46.9
  Top Layer w0.2: STM32.77 97.194,109.056 v1(97.6,109.462)
  Bottom Layer w0.2: v1(97.6,109.462) 97.6,119.241 108.661,130.302 P4.1
NetP4_2: P4.2 STM32.76 | length 53
  Top Layer w0.2: STM32.76 97.694,107.549 v1(98.908,108.763)
  Bottom Layer w0.2: v1(98.908,108.763) 107.188,117.043 117.297,117.043 118.11,117.856 118.11,130.429 P4.2
NetP4_3: P4.3 STM32.72 | length 74.9
  Top Layer w0.2: STM32.72 104.466,92.13 105.562,91.034 105.562,87.478 110.134,82.906 111.76,82.906 118.516,89.662 118.516,132.563 P4.3
NetP4_4: P4.4 STM32.89 | length 53.6
  Top Layer w0.2: STM32.89 91.194,97.968 95.91,102.684 95.91,109.118 v1(95.098,109.931)
  Bottom Layer w0.2: v1(95.098,109.931) 95.098,117.323 P4.4
NetP4_5: P4.5 STM32.90 | length 62
  Top Layer w0.2: STM32.90 90.694,101.565 v1(91.11,101.981)
  Bottom Layer w0.2: v1(91.11,101.981) 91.11,125.4 107.112,141.402 114.757,141.402 P4.5
NetP5_1: P5.1 STM32.93 | length 65.1
  Top Layer w0.2: v1(89.194,93.599) STM32.93
  Bottom Layer w0.2: P5.1 69.825,80.035 101.727,80.035 104.648,82.956 104.648,92.659 103.708,93.599 v1(89.194,93.599)
NetP5_3: P5.3 SIM.21 TS487111.8 | length 27.4
  Top Layer w0.2: P5.3 70.383,83.947 73.451,87.014 73.451,95.091 75.82,97.46 75.82,98.755 ; SIM.21 75.543,100.609 ; TS487111.8 76.403,98.171 75.82,98.755 ; 75.543,100.609 75.543,100.2 75.819,99.924 75.819,98.755 ; 75.543,100.609 75.82,100.333 75.82,98.755
NetQ1_2: Q1.2 STM32.15 | length 31.3
  Top Layer w0.2: STM32.15 85.561,86.63 86.838,85.353 v1(86.838,84.379)
  Bottom Layer w0.2: Q1.2 63.373,81.661 64.592,82.88 85.339,82.88 v1(86.838,84.379)
NetR2_1: R2.1 USB-B-MINI.3 | length 58.5
  Top Layer w0.2: R2.1 63.512,88.595 64.325,89.408 67.285,89.408 69.723,91.846 v1(69.723,97.866) ; v1(106.604,106.147) 107.467,105.283 USB-B-MINI.3
  Bottom Layer w0.2: v1(69.723,97.866) 100.406,97.866 103.797,101.257 103.797,103.34 v1(106.604,106.147)
NetR2_2: R2.2 STM32.71 | length 39.3
  Top Layer w0.2: R2.2 65.012,88.405 65.43,88.824 v1(68.529,88.824) ; v1(97.638,92.126) 98.133,91.63 STM32.71
  Bottom Layer w0.2: v1(68.529,88.824) 71.304,86.049 81.616,86.049 82.066,85.599 91.111,85.599 v1(97.638,92.126)
NetR3_1: R3.1 USB-B-MINI.2 | length 64.8
  Top Layer w0.2: R3.1 59.194,87.859 59.817,88.482 59.817,92.583 v1(61.239,94.005) ; v1(104.597,102.768) 104.962,103.133 110.256,103.133 110.256,104.242 110.015,104.483 USB-B-MINI.2
  Bottom Layer w0.2: v1(61.239,94.005) 64.287,97.053 102.692,97.053 104.597,98.958 v1(104.597,102.768)
NetR3_2: R3.2 STM32.70 | length 51.4
  Top Layer w0.2: R3.2 60.694,87.859 v1(62.103,87.859) ; STM32.70 101.326,91.13 v1(103.835,88.621)
  Bottom Layer w0.2: v1(62.103,87.859) 64.313,85.649 81.216,85.649 81.666,85.199 100.413,85.199 v1(103.835,88.621)
NetR4_2: R4.2 USB-B-MINI.4 | length 54
  Top Layer w0.2: R4.2 69.33,88.431 72.961,92.062 72.961,96.634 v1(75.006,98.679) ; v1(107.406,107.848) 107.406,106.333 107.656,106.083 USB-B-MINI.4
  Bottom Layer w0.2: v1(75.006,98.679) 99.75,98.679 103.296,102.224 103.296,104.781 106.363,107.848 v1(107.406,107.848)
NetR7_1: R7.1 simcard.3 simcard.4 | length 78.8
  Top Layer w0.2: simcard.4 simcard.3 v1(60.198,115.824) ; R7.1 109.867,142.138
  Bottom Layer w0.2: v1(60.198,115.824) 60.198,129.235 61.011,130.048 90.526,130.048 102.743,142.265 109.74,142.265 109.867,142.138
NetR7_2: R7.2
NetR8_2: R8.2
NetR9_1: R9.1 R10.2 R15.2 | length 16.9
  Top Layer w0.2: R9.1 77.228,80.106 78.009,80.887 R15.2 81.94,80.887 82.049,80.996 82.049,91.065 81.686,91.428 R10.2
NetR10_1: R10.1 SIM.22 STM32.34 TS487111.5 | length 44.9
  Top Layer w0.2: SIM.22 76.543,99.479 77.394,98.628 77.394,94.361 TS487111.5@76.937,94.361 ; TS487111.5 TS487111.5@76.937,94.361 ; v1(78.638,94.717) 78.638,91.376 80.086,89.928 ; R10.1 80.086,89.928 ; STM32.34 89.694,87.281 ; TS487111.5@76.937,94.361 76.937,92.265 79.273,89.928 80.086,89.928
  Bottom Layer w0.2: v1(78.638,94.717) 83.49,94.717 89.694,88.512 89.694,87.281
NetR11_2: R11.2 TS487111.1 | length 17.1
  Top Layer w0.2: TS487111.1@71.564,98.171 71.564,96.901 71.564,95.631 71.564,94.361 71.653,94.361 v1(71.653,92.405) ; v1(79.629,87.999) R11.2
  Bottom Layer w0.2: v1(71.653,92.405) 71.717,92.342 75.286,92.342 v1(79.629,87.999)
NetSD_2: SD.2
NetSD_3: SD.3
NetSD_7: SD.7
NetSIM_68: SIM.68 STM32.86 | length 44.5
  Top Layer w0.2: SIM.68 87.543,132.461 96.723,123.281 96.723,100.346 92.694,96.317 STM32.86
NetSIM_71: SIM.71 STM32.87 | length 45.6
  Top Layer w0.2: SIM.71 84.543,125.871 96.317,114.097 96.317,102.421 92.194,98.298 STM32.87
VCC: D1.A R11.1 TS487111.6 | length 70.7
  Top Layer w0.2: v1(74.651,91.542) 75.717,92.608 75.717,95.098 76.251,95.631 TS487111.6 ; v1(75.54,89.865) 77.082,89.865 77.539,89.408 77.539,88.8 79.84,86.499 R11.1
  Bottom Layer w0.2: D1.A 58.42,91.237 59.334,90.322 73.431,90.322 ; v1(74.651,91.542) 73.431,90.322 ; v1(75.54,89.865) 75.082,90.322 73.431,90.322
pads on no net: "chrg bat 0000.15" "chrg bat 0000.16" P3.4 SD.1 SD.5 SD.8 SIM.1 SIM.2 SIM.3 SIM.4 SIM.5 SIM.6 SIM.7 SIM.8 SIM.9 SIM.10 SIM.11 SIM.12 SIM.13 SIM.14 SIM.15 SIM.16 SIM.17 SIM.18 SIM.19 SIM.20 SIM.23 SIM.24 SIM.25 SIM.26 SIM.27 SIM.28 SIM.29 SIM.30 SIM.31 SIM.32 SIM.33 SIM.34 SIM.35 SIM.36 SIM.37 SIM.38 SIM.39 SIM.40 SIM.41 SIM.42 SIM.43 SIM.44 SIM.45 SIM.46 SIM.47 SIM.48 SIM.49 SIM.50 SIM.51 SIM.52 SIM.53 SIM.54 SIM.55 SIM.56 SIM.61 SIM.62 SIM.63 SIM.64 SIM.65 SIM.66 SIM.67 SIM.69 SIM.70 SIM.72 SIM.73 SIM.74 SIM.75 SIM.76 SIM.77 SIM.78 SIM.79 SIM.80 simcard.1 simcard.7 STM32.1 STM32.2 STM32.3 STM32.4 STM32.5 STM32.6 STM32.7 STM32.16 STM32.17 STM32.18 STM32.20 STM32.21 STM32.22 STM32.23 STM32.24 STM32.25 STM32.26 STM32.29 STM32.30 STM32.31 STM32.32 STM32.33 STM32.35 STM32.36 STM32.37 STM32.38 STM32.39 STM32.40 STM32.41 STM32.42 STM32.43 STM32.44 STM32.45 STM32.46 STM32.47 STM32.48 STM32.49 STM32.51 STM32.52 STM32.53 STM32.54 STM32.55 STM32.57 STM32.58 STM32.59 STM32.60 STM32.61 STM32.62 STM32.63 STM32.64 STM32.65 STM32.66 STM32.67 STM32.68 STM32.69 STM32.73 STM32.78 STM32.79 STM32.80 STM32.81 STM32.82 STM32.83 STM32.84 STM32.85 STM32.88 STM32.91 STM32.92 STM32.94 STM32.95 STM32.96 STM32.97 STM32.98 USB-B-MINI.

## Keep-outs
Keep-Out Layer:
  lines w0.3: 52.1,77.5 52.1,144.9 119.5,144.9 119.5,77.5 52.1,77.5

## Dimensions
52.1,77.5 to 52.1,144.9 on Mechanical 1
52.1,77.5 to 119.5,77.5 on Mechanical 1

## Text inside footprints (layer, text, board x,y; h text height)
P3: Top Overlay "1" at 75.057,79.502 h1.27 r90; Top Overlay "2" at 72.517,78.994 h1.27 r90; Top Overlay "4" at 72.517,85.598 h1.27 r90; Top Overlay "3" at 75.057,85.598 h1.27 r90
P5: Top Overlay "1" at 68.961,79.375 h1.27 r90; Top Overlay "2" at 66.421,78.867 h1.27 r90; Top Overlay "4" at 66.421,85.471 h1.27 r90; Top Overlay "3" at 68.961,85.471 h1.27 r90
Q1: Top Overlay "1" at 63.108,82.216 h1.5; Top Overlay "3" at 63.108,79.698 h1.5
SIM: Top Overlay "SimCom GPS-GSM" at 74.467,118.539 h1.52
USB-B-MINI: Mechanical 13 "PCB EDGE" at 117.853,109.537 h0.8 r90